# Altium PCB PCB1.PcbDoc
Units mm, origin at the board's own origin, x right, y up, seen from the top; angles counter-clockwise.
Board outline 58.29 x 46.36 mm, 2 copper layers (Top Layer, Bottom Layer); 34 components, 22 nets, 91 pads, 0 vias.
Unrouted connection lines stored in the file: 1.
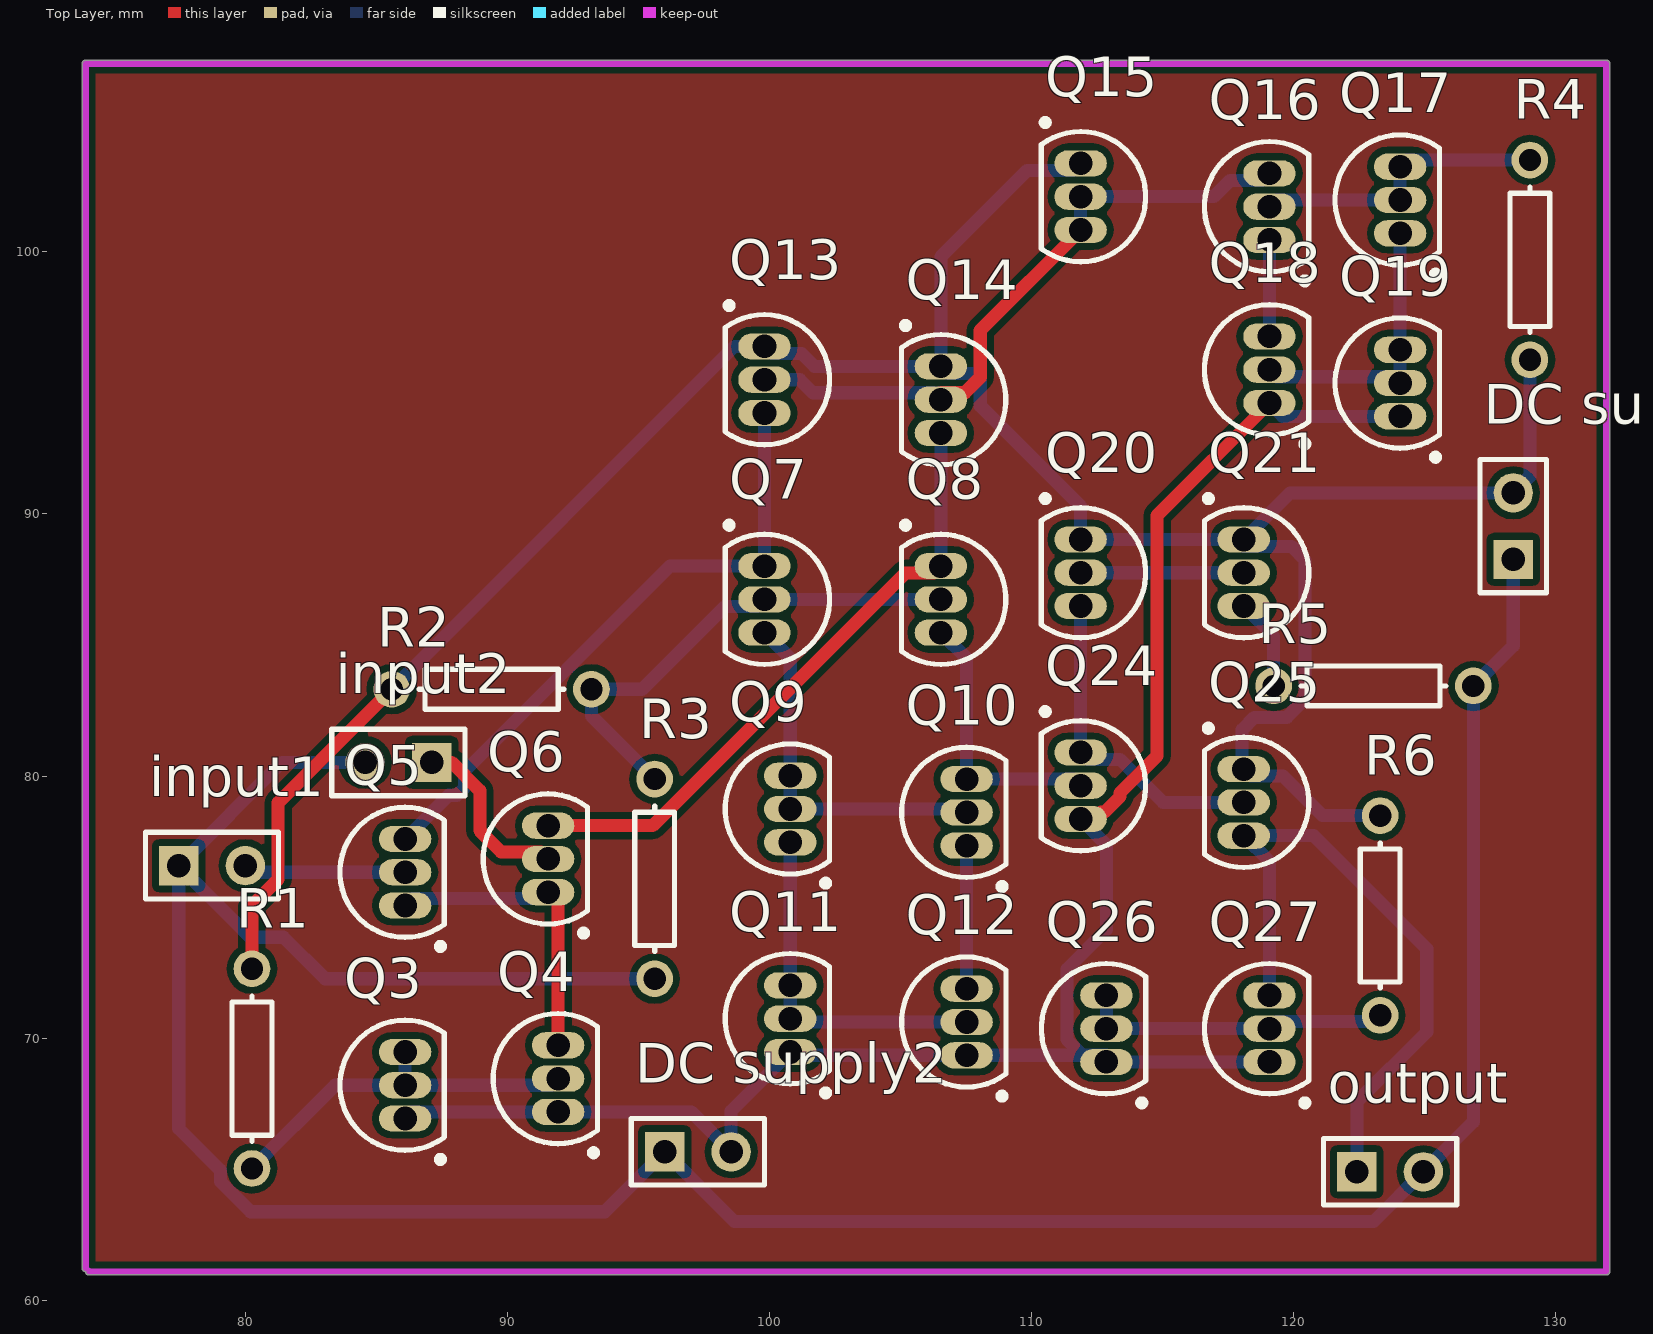
[diagram p0: Top Layer view]
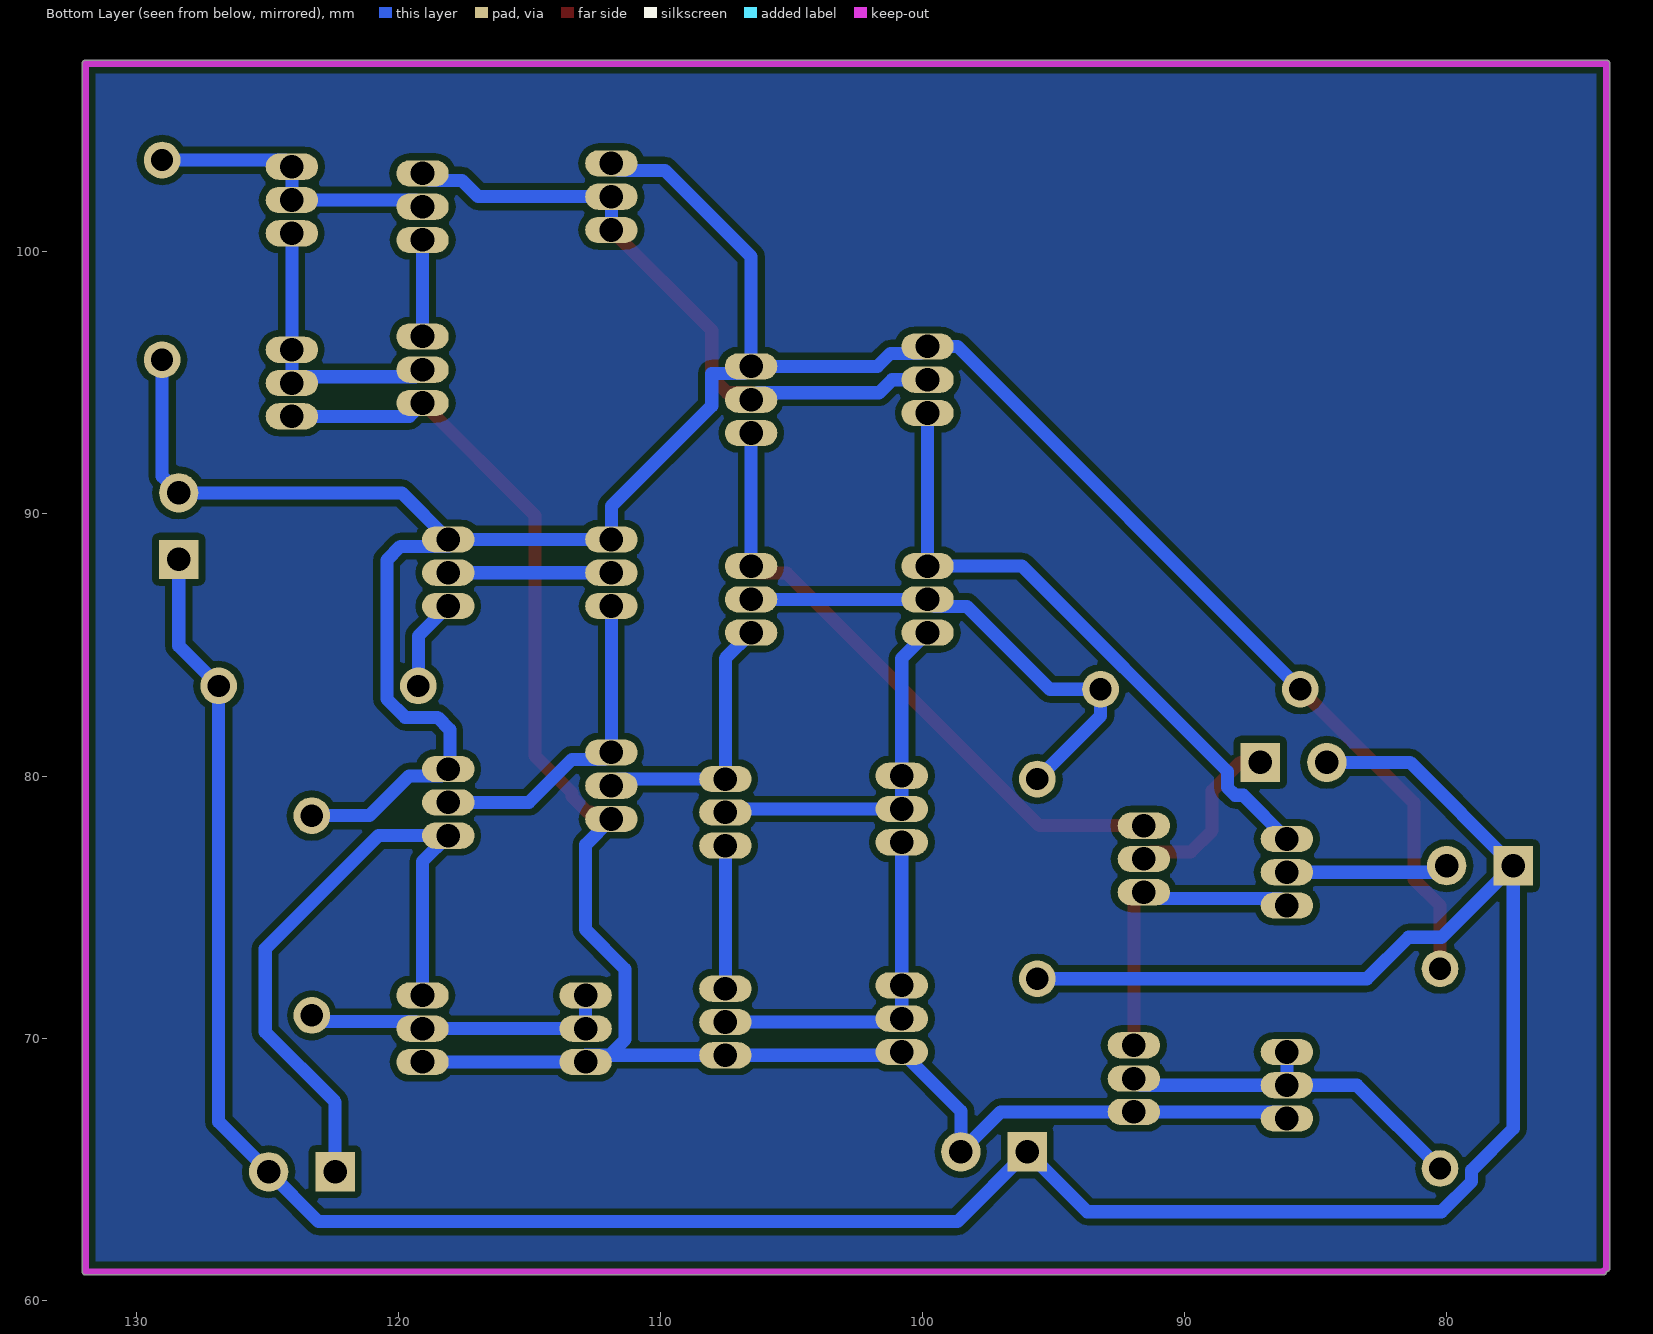
[diagram p1: Bottom Layer view, seen from below]

## Layer stack, top to bottom
Top Solder: solder mask 0.0102, Solder Resist, Dk 3.5
Top Layer: signal copper 0.0356
Dielectric 1: dielectric 0.32, FR-4, Dk 4.8
Bottom Layer: signal copper 0.0356
Bottom Solder: solder mask 0.0102, Solder Resist, Dk 3.5

## Board outline
73.787,61.214 ccw(c73.914,61.214) 73.914,61.087 ccw(c74.041,61.087) 74.041,60.96 131.953,60.96 ccw(c131.953,61.087) 132.08,61.087 132.08,107.188 ccw(c131.953,107.188) 131.953,107.315 73.914,107.315 ccw(c73.914,107.188) 73.787,107.188

## Design rules (kind name [scope] priority, off if disabled: settings)
Clearance [All] p1: gap=0.254 ignorepadtopadclearanceinfootprint=FALSE except(0: Arc-Hole Track-Hole SMDPad-Hole THPad-Hole Via-Hole Fill-Hole Poly-Hole Region-Hole Text-Hole)
PolygonConnect [All] p1: connectstyle=Relief reliefconductorwidth=0.254 reliefentries=4 polygonreliefangle="90 Angle" airgapwidth=0.254
RoutingVias [All] p1: holewidth=0.711 width=1.27 viastyle="Through Hole" minholewidth=0.711 minwidth=1.27 maxholewidth=0.711 maxwidth=1.27
SolderMaskExpansion [All] p1: expansion=0.102
Width [All] p1: maxlimit=2 minlimit=0.254 preferedwidth=0.254 minimp=50.000000 maximp=50.000000 favimp=50.000000
30 further rules are at their usual default settings.

## Components (designator, comment, footprint, x,y, rotation, side; value= is the part's Value field where it differs from the comment)
"DC supply1" "DC" HDR1X2 128.397,88.265 r90 top
"DC supply2" "DC" HDR1X2 96.012,65.659 r0 top
input1 "in" HDR1X2 77.47,76.581 r0 top
input2 "in" HDR1X2 87.122,80.518 r180 top
output "out" HDR1X2 122.428,64.897 r0 top
Q3 "2N3904" TO-92A 86.106,68.199 r0 top
Q4 "2N3904" TO-92A 91.948,68.453 r0 top
Q5 "2N3904" TO-92A 86.106,76.327 r0 top
Q6 "2N3904" TO-92A 91.567,76.835 r0 top
Q7 "2N3906" TO-92A 99.822,86.741 r180 top
Q8 "2N3906" TO-92A 106.553,86.741 r180 top
Q9 "2N3904" TO-92A 100.806,78.74 r0 top
Q10 "2N3904" TO-92A 107.537,78.613 r0 top
Q11 "2N3904" TO-92A 100.806,70.739 r0 top
Q12 "2N3904" TO-92A 107.537,70.612 r0 top
Q13 "2N3906" TO-92A 99.822,95.123 r180 top
Q14 "2N3906" TO-92A 106.553,94.361 r180 top
Q15 "2N3906" TO-92A 111.887,102.108 r180 top
Q16 "2N3904" TO-92A 119.094,101.727 r0 top
Q17 "2N3904" TO-92A 124.079,101.981 r0 top
Q18 "2N3904" TO-92A 119.094,95.504 r0 top
Q19 "2N3904" TO-92A 124.079,94.996 r0 top
Q20 "2N3906" TO-92A 111.887,87.757 r180 top
Q21 "2N3906" TO-92A 118.11,87.757 r180 top
Q24 "2N3906" TO-92A 111.887,79.629 r180 top
Q25 "2N3906" TO-92A 118.11,78.994 r180 top
Q26 "2N3904" TO-92A 112.871,70.358 r0 top
Q27 "2N3904" TO-92A 119.094,70.358 r0 top
R1 "Res1" AXIAL-0.3 80.264,68.834 r90 top value=8.6K
R2 "Res1" AXIAL-0.3 89.408,83.312 r180 top value=9K
R3 "Res1" AXIAL-0.3 95.631,76.073 r90 top value=16K
R4 "Res1" AXIAL-0.3 129.032,99.695 r270 top value=7.2K
R5 "Res1" AXIAL-0.3 123.063,83.439 r180 top value=3.6K
R6 "Res1" AXIAL-0.3 123.317,74.676 r90 top value=4.3K

## Footprints (in the part's own frame and the unit in brackets; to place one, negate y for a bottom-side part, rotate by r counter-clockwise, add the part's x,y. Pads: shape width x height; smd on the part's side, far side on the other; paste and mask are expansions set on the pad)
AXIAL-0.3 [mm] "Axial Device, Thru-Hole; 2 Leads; 0.3 in Pin Spacing"
  round 1.4 hole 0.85: 1(-3.81,0) 2(3.81,0)
  silkscreen extent -2.77,-0.76 2.77,0.76
HDR1X2 [mm] "Connector; Header; 2 Position"
  rect 1.5x1.5 hole 0.9: 1(0,0)
  round 1.5 hole 0.9: 2(2.54,0)
  silkscreen extent -1.27,-1.27 3.81,1.27
TO-92A [mm] "TO, Flat Index; 3 In-Line, Axial Leads; Body Dia. 4.5mm; Leads 0.51 x 0.48 mm (max)"
  oval 2x1 hole 0.9: 1(0,-1.27) 2(0,0) 3(0,1.27)
  silkscreen extent -2.48,-2.95 1.5,2.48, body extent -2.48,-2.5 1.5,2.5, height 6.86

## Part data
"DC supply1" "DC supply2" input1 input2 output: library part "Header 2", "Header, 2-Pin", LatestRevisionDate=17-Jul-2002, LatestRevisionNote="Re-released for DXP Platform.", Publisher="Altium Limited"
Q3 Q4 Q5 Q6 Q9 Q10 Q11 Q12 Q16 Q17 Q18 Q19 Q26 Q27: "NPN General Purpose Amplifier", ComponentLink1Description="Manufacturer Link", ComponentLink1URL=http://www.fairchildsemi.com/, ComponentLink2Description=Datasheet, ComponentLink2URL=http://www.fairchildsemi.com/ds/2N%2F2N3904.pdf, DatasheetVersion=1997, LatestRevisionDate=15-Jan-2003, LatestRevisionNote="PCB Footprint 'BCY-W3/D4.7' replaced", PackageDescription="TO, Flat Index; 3 In-Line, Axial Leads; Body Dia. 4.5mm; Leads 0.51 x 0.48 mm (max)", PackageReference=TO-92A, PackageVersion=Sep-1998, Published=8-Jun-2000, Publisher="Altium Limited"
Q7 Q8 Q13 Q14 Q15 Q20 Q21 Q24 Q25: "PNP General Purpose Amplifier", ComponentLink1Description="Manufacturer Link", ComponentLink1URL=http://www.fairchildsemi.com/, ComponentLink2Description=Datasheet, ComponentLink2URL=http://www.fairchildsemi.com/ds/2N%2F2N3906.pdf, DatasheetVersion=1997, LatestRevisionDate=15-Jan-2003, LatestRevisionNote="PCB Footprint 'BCY-W3/D4.7' replaced", PackageDescription="TO, Flat Index; 3 In-Line, Axial Leads; Body Dia. 4.5mm; Leads 0.51 x 0.48 mm (max)", PackageReference=TO-92A, PackageVersion=Sep-1998, Published=8-Jun-2000, Publisher="Altium Limited"
R1 R2 R3 R4 R5 R6: "Resistor", LatestRevisionDate=17-Jul-2002, LatestRevisionNote="Re-released for DXP Platform.", PackageDescription="Axial Device, Thru-Hole; 2 Leads; 0.3 in Pin Spacing", PackageReference=AXIAL-0.3, Published=8-Jun-2000, Publisher="Altium Limited"

## Nets (pads, with @x,y where several pads share a name; then routed paths per layer and width w, separated by ;. In a path a pad name is that pad's centre, name@x,y a point inside that pad or via, vN(x,y) a via of type N, cw(c..) or ccw(c..) an arc to the next point about the centre after c; other vN are vias at no path point)
GND: "DC supply1.1" "DC supply2.1" input1.1 input2.2 output.2 R3.1 R5.1 | length 115.5
  Bottom Layer w0.5: input2.2@84.582,80.593 input2.2 81.407,80.518 input1.1 ; R3.1 83.053,72.263 81.468,73.848 80.203,73.848 input1.1 ; 128.397,88.265 128.397,84.963 R5.1 126.873,66.802 output.2 123.063,62.992 98.679,62.992 96.012,65.659 93.726,63.373 80.212,63.373 79.06,64.525 79.06,64.958 77.47,66.548 input1.1
Netinput1_2: input1.2 Q5.2 | length 6.2
  Bottom Layer w0.5: input1.2 80.264,76.327 Q5.2
Netinput2_1: input2.1 Q6.2 | length 6.9
  Top Layer w0.5: input2.1 87.884,80.518 88.963,79.438 88.963,77.915 89.777,77.101 91.301,77.101 Q6.2
Netoutput_1: output.1 Q25.3 Q27.3 | length 24.9
  Bottom Layer w0.5: Q27.3 119.094,76.74 Q25.3 120.777,77.724 125.095,73.406 125.095,70.231 122.428,67.564 output.1
NetQ3_2: Q3.2 Q3.3 Q4.2 R1.1 | length 14.4
  Bottom Layer w0.5: R1.1 83.439,68.199 Q3.2 ; Q3.3 Q3.2 ; Q4.2 91.694,68.199 Q3.2
NetQ4_3: Q4.3 Q5.1 Q6.1 | length 11.8
  Top Layer w0.5: Q6.1 91.948,75.184 Q4.3
  Bottom Layer w0.5: Q5.1 86.372,75.323 91.567,75.323 Q6.1
NetQ5_3: Q5.3 Q7.1 Q13.3 | length 24.2
  Bottom Layer w0.5: Q5.3 87.773,79.264 88.081,79.264 88.376,79.559 88.376,80.173 96.214,88.011 Q7.1 Q13.3
NetQ6_3: Q6.3 Q8.1 Q14.3 | length 24.2
  Top Layer w0.5: Q6.3 95.556,78.105 105.196,87.745 106.287,87.745 Q8.1
  Bottom Layer w0.5: Q8.1 Q14.3
NetQ7_2: Q7.2 Q8.2 R2.1 R3.2 | length 19.2
  Bottom Layer w0.5: R3.2 93.218,82.296 R2.1 95.155,83.312 98.318,86.475 99.556,86.475 Q7.2 Q8.2
NetQ7_3: Q7.3 Q9.2 Q9.3 Q10.2 | length 13.9
  Bottom Layer w0.5: Q7.3 100.806,84.487 Q9.3 Q9.2 107.41,78.74 Q10.2
NetQ8_3: Q8.3 Q10.3 Q24.2 | length 10.5
  Bottom Layer w0.5: Q8.3 107.537,84.487 Q10.3 111.633,79.883 Q24.2
NetQ9_1: Q9.1 Q11.2 Q11.3 Q12.2 | length 13.5
  Bottom Layer w0.5: Q9.1 Q11.3 Q11.2 100.933,70.612 Q12.2
NetQ10_1: Q10.1 Q12.3 | length 5.5
  Bottom Layer w0.5: Q12.3 Q10.1
NetQ13_2: Q13.2 Q14.2 Q15.2 Q15.3 Q16.3 | length 25.4
  Top Layer w0.5: Q14.2 106.553,94.627 107.469,94.627 108.057,95.215 108.057,97.008 Q15.3 Q15.3@111.887,100.584
  Bottom Layer w0.5: Q13.2 101.172,95.123 101.668,94.627 106.287,94.627 Q14.2 ; Q15.3 Q15.2 116.967,102.108 117.59,102.731 118.828,102.731 Q16.3
NetQ16_1: Q16.1 Q18.3 | length 3.7
  Bottom Layer w0.5: Q18.3 Q16.1
NetQ16_2: Q16.2 Q17.2 Q17.3 R4.1 | length 11.4
  Bottom Layer w0.5: Q16.2 119.348,101.981 Q17.2 Q17.3 124.333,103.505 R4.1
NetQ17_1: Q17.1 Q18.2 Q19.2 Q19.3 | length 10.8
  Bottom Layer w0.5: Q18.2 119.36,95.238 Q19.2@124.079,95.238 ; Q19.2 Q19.2@124.079,95.238 ; Q17.1 Q19.3 Q19.2@124.079,95.238
NetQ20_2: Q20.2 Q21.2 Q21.3 R5.2 | length 9.7
  Bottom Layer w0.5: Q20.2 Q21.2 ; Q21.3 119.253,85.344 R5.2
NetQ20_3: Q20.3 Q24.1 Q25.2 | length 12.6
  Bottom Layer w0.5: Q20.3 Q24.1 112.153,80.633 113.391,80.633 115.03,78.994 Q25.2
NetQ26_2: Q26.2 Q26.3 Q27.2 R6.1 | length 12.1
  Bottom Layer w0.5: Q26.3 Q26.2 Q27.2 119.36,70.624 123.317,70.624 R6.1
VCC: "DC supply1.2" Q13.1 Q14.1 Q15.1 Q20.1 Q21.1 Q25.1 R1.2 R2.2 R4.2 R6.2 | length 101.2
  Top Layer w0.5: R1.2 80.264,75.062 81.264,76.062 81.264,78.978 R2.2
  Bottom Layer w0.5: R2.2 98.679,96.393 Q13.1 100.088,96.127 101.234,96.127 101.73,95.631 Q14.1 ; Q15.1 111.621,103.112 109.843,103.112 106.553,99.822 Q14.1 ; R6.2 121.126,78.486 119.614,79.998 118.376,79.998 Q25.1 118.049,80.325 118.049,81.764 118.52,82.235 119.752,82.235 120.457,82.94 120.457,88.241 119.937,88.761 118.11,88.761 Q21.1 ; R4.2 129.032,91.44 128.397,90.805 119.888,90.805 Q21.1 ; Q14.1 106.819,95.365 108.057,95.365 108.057,94.127 111.887,90.297 Q20.1 Q21.1
VEE: "DC supply2.2" Q3.1 Q4.1 Q11.1 Q12.1 Q18.1 Q19.1 Q24.3 Q26.1 Q27.1 | length 72.3
  Top Layer w0.5: Q24.3 112.395,78.359 112.661,78.625 112.803,78.625 113.391,79.213 113.391,79.355 114.808,80.772 114.808,89.948 Q18.1
  Bottom Layer w0.5: Q3.1 86.36,67.183 Q4.1 97.028,67.183 98.552,65.659 98.552,67.215 Q11.1 100.933,69.342 Q12.1 112.617,69.342 Q26.1 ; Q24.3 112.871,77.375 112.871,74.136 111.367,72.632 111.367,69.942 111.955,69.354 112.871,69.354 Q26.1 ; Q27.1 Q26.1 ; Q18.1 119.602,93.726 Q19.1

## Polygon pours and split planes (outlines as drawn)
no net on Bottom Layer "Bottom Layer-No Net" (solid, pour order 0): 74.041,61.087 131.953,61.087 131.953,107.188 73.914,107.188
no net on Top Layer "Bottom Layer-No Net" (solid, pour order 2): 73.914,107.188 131.953,107.188 131.953,61.087 74.041,61.087

## Keep-outs
Keep-Out Layer:
  lines w0.254: 73.914,61.214 74.041,61.087 131.953,61.087 131.953,107.188 73.914,107.188 73.914,61.214